# Allegro board HOME_ATMEGA328.brd
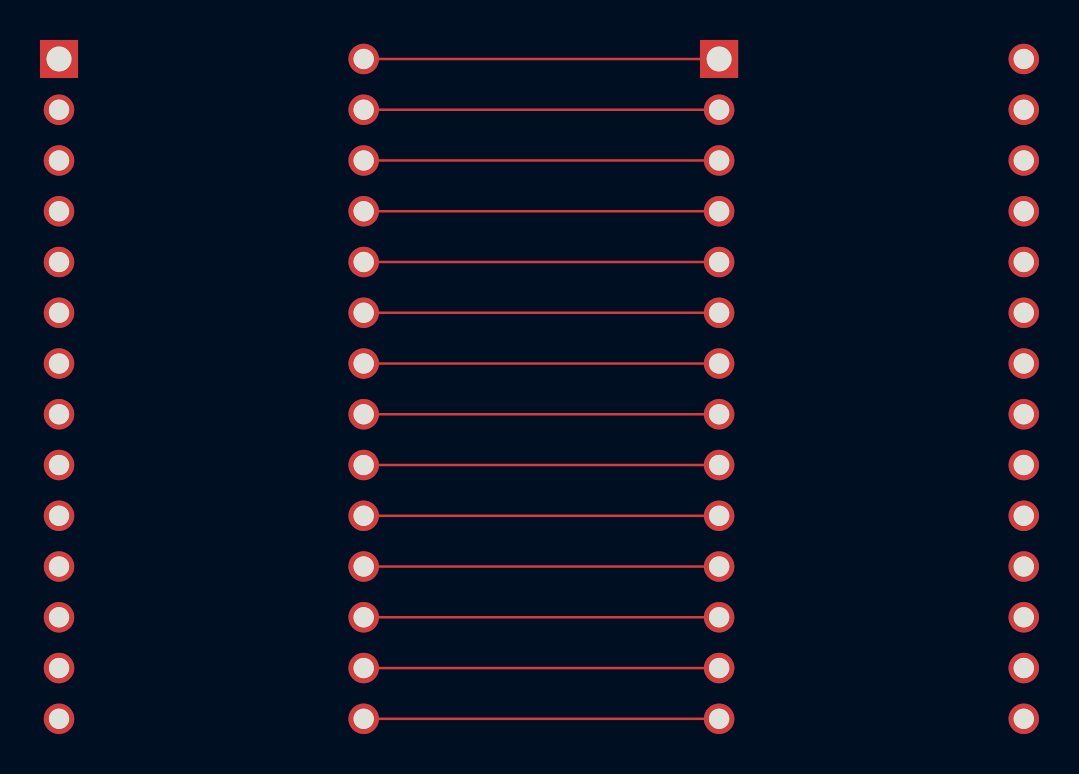
[diagram p0: board, top side]
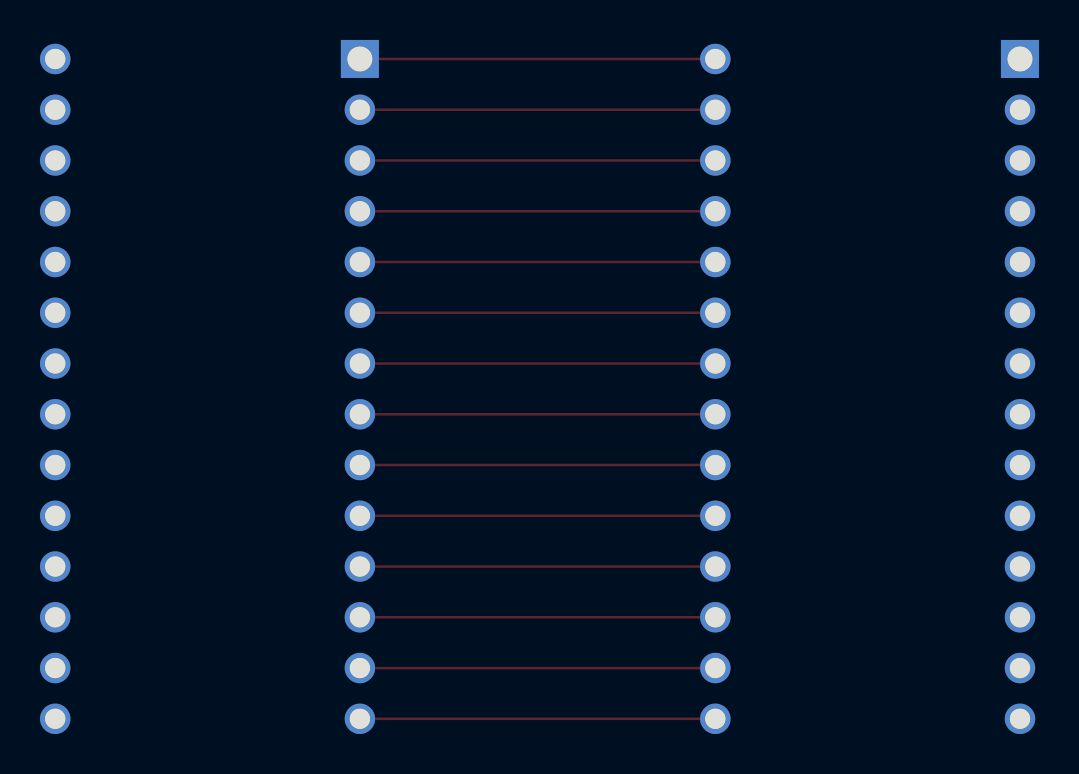
[diagram p1: board, bottom side, seen from below]

No outline. copper layers: TOP, BOTTOM. Coordinates in mm from the lowest, leftmost part position.

## Placement (name value [footprint] x y rotation side)
J2  DIPSOC-14x2  [HOME_ATMEGA328]  0 0 0 top
J3  DIPSOC-14x2  [HOME_ATMEGA328]  33.02 0 0 top

## Library data of the parts
J2 J3 = DIPSOC-14x2

## Footprints (pads in the part's own frame, mm; a bottom-side part is the same pattern mirrored in y, then rotated)
HOME_ATMEGA328
  rect 1.905x1.905 hole 1.245: 1(0,0)
  round 1.524 hole 1.016: 2(0,-2.54) 3(0,-5.08) 4(0,-7.62) 5(0,-10.16) 6(0,-12.7) 7(0,-15.24) 8(0,-17.78) 9(0,-20.32) 10(0,-22.86) 11(0,-25.4) 12(0,-27.94) 13(0,-30.48) 14(0,-33.02) 15(15.24,-33.02) 16(15.24,-30.48) 17(15.24,-27.94) 18(15.24,-25.4) 19(15.24,-22.86) 20(15.24,-20.32) 21(15.24,-17.78) 22(15.24,-15.24) 23(15.24,-12.7) 24(15.24,-10.16) 25(15.24,-7.62) 26(15.24,-5.08) 27(15.24,-2.54) 28(15.24,0)

## Nets
N00371: J2.28 J3.1
N00373: J2.27 J3.2
N00375: J2.26 J3.3
N00377: J2.25 J3.4
N00379: J2.24 J3.5
N00381: J2.23 J3.6
N00383: J2.22 J3.7
N00385: J2.21 J3.8
N00387: J2.20 J3.9
N00389: J2.19 J3.10
N00391: J2.18 J3.11
N00393: J2.17 J3.12
N00395: J2.16 J3.13
N00397: J2.15 J3.14

Pads without a net: J2 1 2 3 4 5 6 7 8 9 10 11 12 13 14; J3 15 16 17 18 19 20 21 22 23 24 25 26 27 28

## Routing (per net, layer and track width the routed paths; a pad name or vN(x,y) marks a point on that pad's centre or on a via; arc(x,y) is an arc through that point)
N00371: length 17.8
  TOP w0.127: J2.28 J3.1
N00373: length 17.8
  TOP w0.127: J3.2 J2.27
N00375: length 17.8
  TOP w0.127: J2.26 J3.3
N00377: length 17.8
  TOP w0.127: J3.4 J2.25
N00379: length 17.8
  TOP w0.127: J2.24 J3.5
N00381: length 17.8
  TOP w0.127: J3.6 J2.23
N00383: length 17.8
  TOP w0.127: J2.22 J3.7
N00385: length 17.8
  TOP w0.127: J3.8 J2.21
N00387: length 17.8
  TOP w0.127: J2.20 J3.9
N00389: length 17.8
  TOP w0.127: J3.10 J2.19
N00391: length 17.8
  TOP w0.127: J2.18 J3.11
N00393: length 17.8
  TOP w0.127: J3.12 J2.17
N00395: length 17.8
  TOP w0.127: J2.16 J3.13
N00397: length 17.8
  TOP w0.127: J3.14 J2.15
